# EAGLE board controller_dist_distpn (EAGLE 6.4)
HEIGHT: 2; PARTNAME: controller; REVISION: 4.1; WIDTH: 1.3
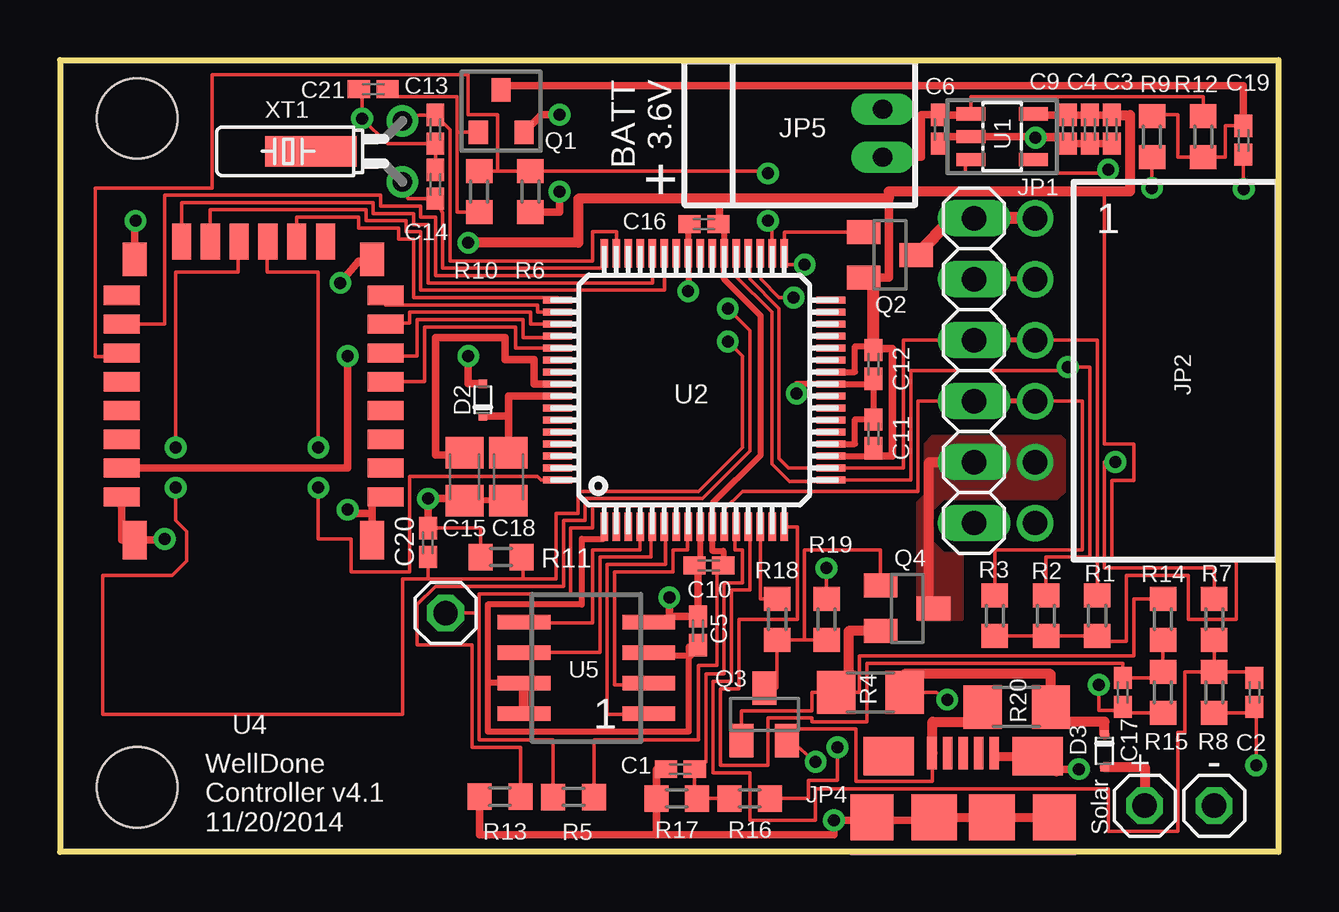
[diagram p0: board, top side]
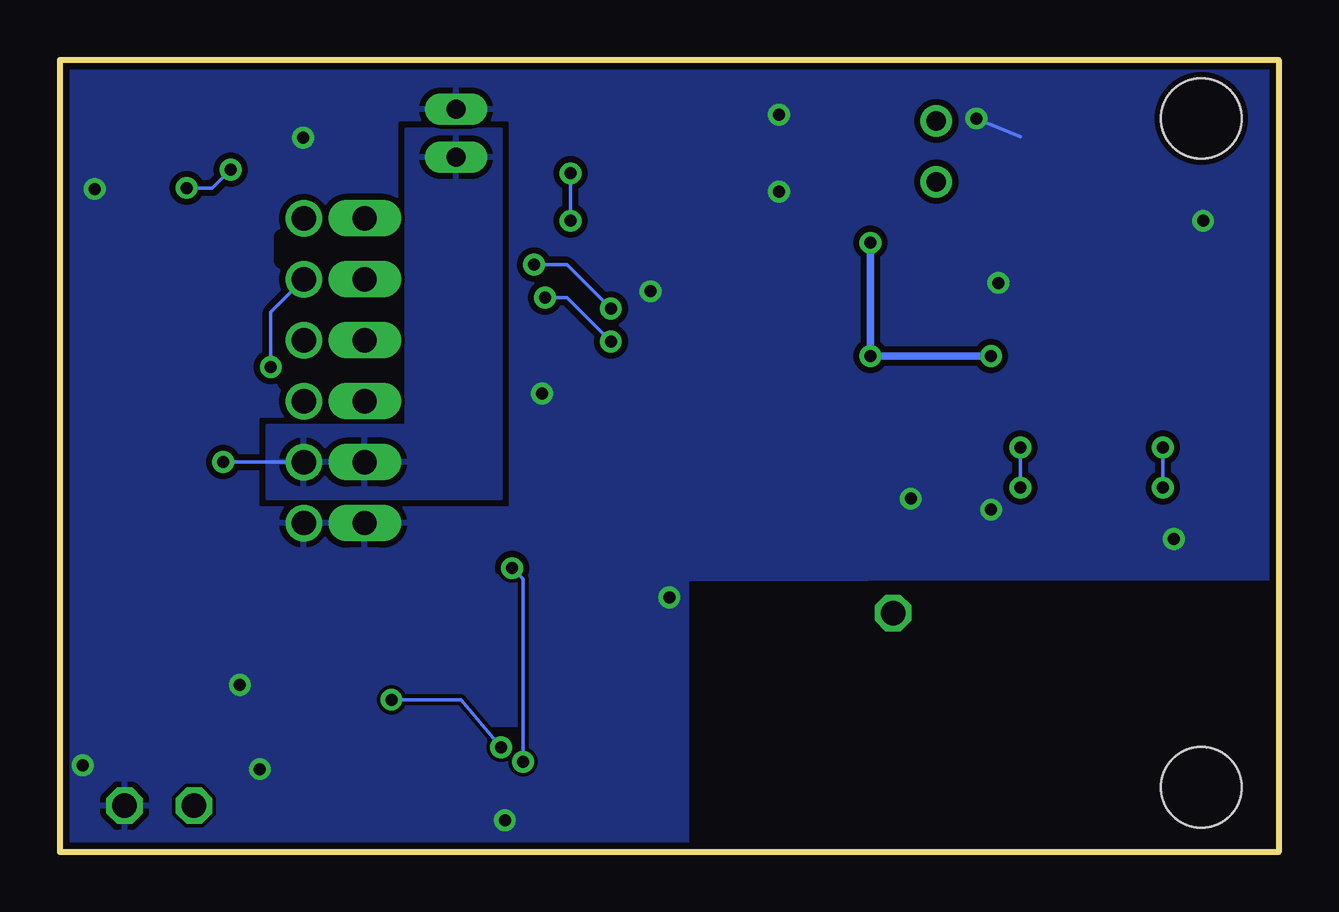
[diagram p1: board, bottom side, seen from below]

Size 50.8 x 33.02 mm. Coordinates in mm from the lower left corner, seen from the top.
Outline: 50.8,0 50.8,33.02 0,33.02 0,0 50.8,0
Copper layers (1*16): Top 0.035mm / dielectric 1.5mm / Bottom 0.035mm
Design rules "default *": minimum track width 6mil, minimum drill 19mil, track to track 6mil, track to pad 6mil, pad to pad 6mil, via to via 6mil, smd to smd 6mil, copper to edge 10mil, drill to drill 8mil, minimum pad ring 10mil, minimum via ring 8mil, stop-mask expansion 4mil, vias tented up to drill 0mil, thermal gap 10mil
Net classes: 0 default: width 0.152 mm, drill 0.305 mm, clearance 0.152 mm
Holes 3.35 mm at 3.23,2.69 3.23,30.58
bRestrict: area 41.3,19.6 to 41.4,20.6; area 41.3,24.6 to 41.6,25.7

## Footprints (pad centres in the part's own frame; a part is rotated, then mirrored left to right if it is on the bottom)
C0402K = smd 0.925 x 0.74: 1 -0.6,0; 2 0.6,0
C0805K = smd 1.3 x 1.6: 1 -1,0; 2 1,0
SC79_INFINEON = smd 0.35 x 0.35: A 0.675,0; C -0.675,0
1X06 = drill 1.016 long: 1 -8.89,0; 3 -6.35,0; 4 -3.81,0; 5 -1.27,0; 6 1.27,0; 7 3.81,0
MOMO-EDGE-8F = drill 1.016: ARLM 0,2.54; CLK 0,7.62; DAT 0,5.08; GND 0,-2.54; V4 0,0; V28 0,10.16
1X01 = drill 1.016 octagon: 1 0,0
MICROUSB-B-FCI = smd 0.4 x 1.35: 1 -1.3,2.675; 2 -0.65,2.675; 3 0,2.675; 4 0.65,2.675; 5 1.3,2.675 | smd 2.1 x 1.6: GND1 -3.1,2.55; GND2 3.1,2.55 | smd 1.8 x 1.9: GND3 -3.8,0; GND6 3.8,0 | smd 1.9 x 1.9: GND4 -1.2,0; GND5 1.2,0
MOMO-PWR-HOUSED = drill 0.8 long: 1 -1,0; 2 1,0
SOT-23 = smd 0.802 x 0.972: 1 -0.95,-0.885; 2 0.95,-0.885; 3 0,0.885
SOT23 = smd 1 x 1.4: 1 -0.95,-1.1; 2 0.95,-1.1; 3 0,1.1
R0603 = smd 1 x 1.1: 1 -0.85,0; 2 0.85,0
R1206 = smd 1.6 x 1.803: 1 -1.422,0; 2 1.422,0
SOT23-5L = smd 0.55 x 1.2: 1 -0.95,-1.3; 2 0,-1.3; 3 0.95,-1.3; 4 0.95,1.3; 5 -0.95,1.3
TQFP64-10X10 = smd 1.2 x 0.3: 1 -5.7,3.75; 2 -5.7,3.25; 3 -5.7,2.75; 4 -5.7,2.25; 5 -5.7,1.75; 6 -5.7,1.25; 7 -5.7,0.75; 8 -5.7,0.25; 9 -5.7,-0.25; 10 -5.7,-0.75; 11 -5.7,-1.25; 12 -5.7,-1.75; 13 -5.7,-2.25; 14 -5.7,-2.75; 15 -5.7,-3.25; 16 -5.7,-3.75; 33 5.7,-3.75; 34 5.7,-3.25; 35 5.7,-2.75; 36 5.7,-2.25; 37 5.7,-1.75; 38 5.7,-1.25; 39 5.7,-0.75; 40 5.7,-0.25; 41 5.7,0.25; 42 5.7,0.75; 43 5.7,1.25; 44 5.7,1.75; 45 5.7,2.25; 46 5.7,2.75; 47 5.7,3.25; 48 5.7,3.75 | smd 0.3 x 1.2: 17 -3.75,-5.7; 18 -3.25,-5.7; 19 -2.75,-5.7; 20 -2.25,-5.7; 21 -1.75,-5.7; 22 -1.25,-5.7; 23 -0.75,-5.7; 24 -0.25,-5.7; 25 0.25,-5.7; 26 0.75,-5.7; 27 1.25,-5.7; 28 1.75,-5.7; 29 2.25,-5.7; 30 2.75,-5.7; 31 3.25,-5.7; 32 3.75,-5.7; 49 3.75,5.7; 50 3.25,5.7; 51 2.75,5.7; 52 2.25,5.7; 53 1.75,5.7; 54 1.25,5.7; 55 0.75,5.7; 56 0.25,5.7; 57 -0.25,5.7; 58 -0.75,5.7; 59 -1.25,5.7; 60 -1.75,5.7; 61 -2.25,5.7; 62 -2.75,5.7; 63 -3.25,5.7; 64 -3.75,5.7
RN20-BTLE-MODULE = smd 1.5 x 0.8: AIO0 0.25,7.3; AIO1 0.25,8.5; AIO2 0.25,9.7; CMD/MLDP 0.25,2.5; GND 11.25,10.9; GND1 0.25,10.9; PIO7 11.25,4.9; RSVD1 11.25,6.1; RSVD2 11.25,7.3; RSVD3 11.25,8.5; RTS/PIO6 11.25,3.7; SPI/PIO 11.25,2.5; UART_RX 0.25,4.9; UART_TX 0.25,6.1; VDD 11.25,9.7; WAKE_SW 0.25,3.7 | smd 0.8 x 1.5: PIO1 2.75,0.25; PIO2 3.95,0.25; PIO3 5.15,0.25; PIO4 6.35,0.25; PIO5 7.55,0.25; WAKE_HW 8.75,0.25 | smd 1 x 1.4: SHIELD1 0.8,1; SHIELD2 10.7,1 | smd 1 x 1.6: SHIELD3 0.8,12.7; SHIELD4 10.7,12.7
SOP08 = smd 0.6 x 2.2: 1 -1.905,-2.6; 2 -0.635,-2.6; 3 0.635,-2.6; 4 1.905,-2.6; 5 1.905,2.6; 6 0.635,2.6; 7 -0.635,2.6; 8 -1.905,2.6
TC26H = drill 0.813: 1 -1.27,0; 2 1.27,0 | smd 1.27 x 3.81: NC-CAN 0,3.81

## Placement (x,y rotation side)
C1  100 nF  [C0402K]  25.86,3.45 180 top
C2  100 nF  [C0402K]  49.78,6.65 270 top
C3  33 pF  [C0402K]  43.84,30.12 270 top
C4  10 pF  [C0402K]  42.93,30.12 270 top
C5  100 nF  [C0402K]  26.59,9.22 90 top
C6  1 uF  [C0402K]  36.68,30.12 270 top
C9  1 uF  [C0402K]  42.01,30.12 270 top
C10  100nF  [C0402K]  27.05,11.95 180 top
C11  100nF  [C0402K]  33.91,17.43 90 top
C12  100 nF  [C0402K]  33.91,20.33 270 top
C13  18 pF  [C0402K]  15.65,27.84 90 top
C14  18 pF  [C0402K]  15.65,30.12 270 top
C15  10 uF  [C0805K]  16.87,15.65 270 top
C16  100nF  [C0402K]  26.84,26.18 180 top
C17  100 nF  [C0402K]  44.3,6.65 270 top
C18  10 uF  [C0805K]  18.69,15.65 270 top
C19  1 uF  [C0402K]  49.33,29.67 270 top
C20  22 pF  [C0402K]  15.34,12.9 90 top
C21  1 uF  [C0402K]  13.06,31.8 180 top
D2  [SC79_INFINEON]  17.63,18.85 90 top
D3  [SC79_INFINEON]  43.54,4.22 270 top
JP1  MOMO-VERT-6M  [1X06]  38.1,17.53 270 top
JP2  MOMO-EDGE-6F  [MOMO-EDGE-8F]  40.64,16.26 0 top
JP3  [1X01]  16.07,9.96 0 top
JP4  CONN-MICROUSB-B-RCPT  [MICROUSB-B-FCI]  37.64,1.45 0 top
JP5  MOMO-PWR-HOUSED  [MOMO-PWR-HOUSED]  34.29,29.97 90 top
JP7  [1X01]  48.11,1.93 0 top
JP8  [1X01]  45.21,1.93 0 top
Q1  MOSFET-N  [SOT-23]  18.39,30.89 0 top
Q2  P-MOSFET  [SOT23]  34.59,24.89 270 top
Q3  [SOT23]  29.36,5.74 0 top
Q4  P-MOSFET  [SOT23]  35.31,10.16 270 top
R1  10K  [R0603]  43.23,9.86 270 top
R2  10K  [R0603]  41.1,9.86 270 top
R3  10K  [R0603]  38.96,9.86 270 top
R4  1 ohm  [R1206]  33.78,6.65 180 top
R5  10K  [R0603]  21.41,2.29 0 top
R6  100K  [R0603]  19.61,27.53 90 top
R7  510K  [R0603]  48.11,9.7 90 top
R8  510K  [R0603]  48.11,6.65 90 top
R9  10K  [R0603]  45.52,29.82 90 top
R10  100K  [R0603]  17.48,27.53 90 top
R11  100K  [R0603]  18.39,12.29 0 top
R12  510K  [R0603]  47.65,29.82 90 top
R13  100K  [R0603]  18.34,2.31 0 top
R14  510K  [R0603]  45.97,9.7 90 top
R15  510K  [R0603]  45.97,6.65 90 top
R16  510K  [R0603]  28.75,2.24 0 top
R17  510K  [R0603]  25.7,2.24 0 top
R18  10K  [R0603]  29.9,9.7 270 top
R19  100K  [R0603]  31.95,9.7 90 top
R20  1 ohm  [R1206]  39.88,6.05 0 top
U1  XC6504-LINEAR-REGULATOR  [SOT23-5L]  39.27,29.82 270 top
U2  PIC24FJ64GA306  [TQFP64-10X10]  26.44,19.26 90 top
U4  RN4020_BT_4.0_MODULE  [RN20-BTLE-MODULE]  13.82,25.7 180 top
U5  FLASH8MSOP8  [SOP08]  21.95,7.67 90 top
XT1  32.768khz  [TC26H]  14.27,29.21 90 top

## Library data of the parts
C1 C2 C5 C10-C12 C16 C17 = rcl; DIGIKEY-PN: 445-1265-1-ND
C3 = rcl; DIGIKEY-PN: 1276-1272-1-ND
C4 = rcl; DIGIKEY-PN: 1276-1139-1-ND
C6 C9 C19 C21 = rcl; DIGIKEY-PN: 445-4114-1-ND
C13 C14 = rcl; DIGIKEY-PN: 445-1238-1-ND
C15 C18 = rcl; DIGIKEY-PN: 1276-2893-1-ND
C20 = rcl; DIGIKEY-PN: 1276-1116-1-ND
D2 = diode; DIGIKEY-PN: RB520S30T1GOSCT-ND; FOOTPRINT: SC-79
D3 = diode; DIGIKEY-PN: RB520S30T1GOSCT-ND; FOOTPRINT: SC79
JP1 = components; DESCRIPTION: 6 Pin Vertical Male Header; DIGIKEY-PN: S1011EC-06-ND; FOOTPRINT: Through Hole
JP2 = components; DESCRIPTION: 6-pin female R/A header; DIGIKEY-PN: S5442-ND; FOOTPRINT: Through Hole
JP3 = pinhead; POPULATE: no
JP4 = custom_ics; DESCRIPTION: MicroUSB-B Receptacle; DIGIKEY-PN: 609-4613-1-ND; FOOTPRINT: Custom SMD
JP5 = components; DESCRIPTION: R/A Shrouded 2 pin connector; DIGIKEY-PN: 455-1719-ND; FOOTPRINT: Through HOle
JP7 JP8 = pinhead; POPULATE: NO
Q1 = custom_ics; DESCRIPTION: N-Channel MOSFET 2N7002P; DIGIKEY-PN: 568-5818-1-ND; FOOTPRINT: SOT-23
Q2 = components; DESCRIPTION: P Channel MOSFET; DIGIKEY-PN: IRLML6402PBFCT-ND
Q3 = transistor-pnp; DESCRIPTION: PNP Transistor; DIGIKEY-PN: 568-1742-1-ND; FOOTPRINT: SOT23
Q4 = components; DIGIKEY-PN: IRLML6402PBFCT-ND
R1-R3 R5 R9 R18 = rcl; DIGIKEY-PN: P10.0KHCT-ND
R4 R20 = rcl; DIGIKEY-PN: 311-1.00FRCT-ND
R6 R10 R11 R13 R19 = rcl; DIGIKEY-PN: P100KHCT-ND
R7 R8 R12 R14-R17 = rcl; DIGIKEY-PN: P510KHCT-ND
U1 = custom_ics; DESCRIPTION: XC6504 Linear Regulator 2.8V; DIGIKEY-PN: 893-1200-1-ND; FOOTPRINT: SOT23-5
U2 = components; DESCRIPTION: PIC24FJ64GA306 Microcontroller; DIGIKEY-PN: PIC24FJ64GA306-I/PT-ND; FOOTPRINT: TQFN64-10mm
U4 = custom_ics; DESCRIPTION: RN4020 Bluetooth 4.0 Module; DIGIKEY-PN: RN4020-V/RM-ND; FOOTPRINT: Custom SMD
U5 = components; DESCRIPTION: M25PX80 1MB Serial Flash; DIST: Digikey; DIST-PN: M25PX80-VMN6TPCT-ND
XT1 = components; DESCRIPTION: Quartz Crystal (Radial Can); DIGIKEY-PN: 535-9034-ND; FOOTPRINT: Through Hole

## Nets
CHG_EN: R18.1 U2.14
CHG_I+: D3.C R4.1 R16.2 R20.2
CHG_I-: Q3.1 Q4.2 R4.2 R14.2
CMD: U2.50 U4.CMD/MLDP
CONN: U4.PIO1
CS: U2.6 U5.1
CTS: U2.43 U4.PIO5
GND: C1.2 C2.2 C3.2 C4.2 C5.2 C6.2 C9.2 C10.2 C11.2 C12.2 C13.2 C14.2 C15.2 C16.2 C17.2 C18.2 C19.2 C20.2 C21.2 JP1.7 JP2.GND JP4.5 JP4.GND2 JP4.GND3 JP4.GND4 JP4.GND5 JP4.GND6 JP5.2 JP7.1 Q1.2 R6.1 R8.1 R11.1 R13.1 R15.1 R17.1 U1.2 U2.9 U2.20 U2.25 U2.41 U4.GND U4.GND1 U4.SHIELD1 U4.SHIELD2 U4.SHIELD3 U4.SHIELD4 U5.4
HW_RESET: R6.2 R10.2 U2.34 U4.PIO7
ICLK: JP1.3 JP2.CLK R2.1 U2.17 U2.37
IDAT: JP1.4 JP2.DAT R1.1 U2.18 U2.36
IRQ: JP1.5 JP2.ARLM R3.1 U2.11
MEM_POW: C5.1 U2.1 U5.3 U5.7 U5.8
MLDP_EV: U2.49 U4.PIO2
N$1: R9.1 U1.3
N$2: C21.1 Q1.1 R10.1
N$3: D3.A JP8.1
N$4: JP3.1 R5.1 U2.7
N$5: JP4.1 Q3.2 R19.2 R20.1
N$6: C14.1 U2.47 XT1.2
N$7: C13.1 U2.48 XT1.1
N$10: Q3.3 Q4.1 R18.2 R19.1
N$11: C19.1 Q1.3 R9.2 R12.1
PIO3: U2.64 U4.PIO3
PIO4: C20.1 R11.2 U2.35 U4.PIO4
RTS: U2.45 U4.RTS/PIO6
RX: U2.52 U4.UART_RX
SAMP_CHG+: C1.1 R16.1 R17.2 U2.12
SAMP_CHG-: C17.1 R14.1 R15.2 U2.16
SCLK: U2.5 U5.6
SDI: U2.8 U5.2
SDO: U2.4 U5.5
TX: U2.53 U4.UART_TX
V+: C6.1 JP1.6 JP2.V4 JP5.1 Q4.3 R7.2 R12.2 U1.1
VBAT: C18.1 D2.C U2.57
VBAT_SAMP: C2.1 R7.1 R8.2 U2.13
VCAP: C15.1 U2.56
VCC_EN: Q2.1 R13.2 U2.33
VCCINT: C3.1 C4.1 C9.1 C10.1 C11.1 C12.1 C16.1 D2.A Q2.2 R1.2 R2.2 R3.2 R5.2 U1.5 U2.10 U2.19 U2.26 U2.38 U4.VDD
VCCIO: JP1.1 JP2.V28 Q2.3
WAKE_HW: U2.44 U4.WAKE_HW
WAKE_SW: U2.51 U4.WAKE_SW

## Tracks (layer width: path | path; a pad name or v marks a point on that pad's centre or on a via)
CHG_EN
  Top 0.152: 30.19,10.55 R18.1 29.19,10.55 U2.14
CHG_I+  (via drill 0.5)
  Top 0.152: R16.2 31.19,2.23 31.19,3 32.41,3 v32.41,4.37 | v36.98,6.35 36.53,6.65 R4.1
  Top 0.406: R4.1 35.2,7.42 41.3,7.42 R20.2 41.4,6.04 41.4,5.44 43.54,5.44 D3.C
  Bottom 0.152: v32.41,4.37 34.09,6.35 v36.98,6.35
CHG_I-
  Top 0.152: R14.2 44.75,10.55 44.75,8.18 33.33,8.18 33.33,6.65 32.87,6.65 R4.2 31.34,6.65 31.34,5.89 28.41,5.89 Q3.1
  Top 0.406: Q4.2 32.87,9.21 32.87,6.65
CMD
  Top 0.152: U2.50 19.91,22.51 19.91,22.81 13.57,22.81 U4.CMD/MLDP
CS
  Top 0.152: U5.1 24.55,5.74 22.81,5.74 22.81,11.99 25.25,11.99 25.25,13.56 U2.6 25.22,13.53
CTS
  Top 0.152: U4.PIO5 6.27,26.77 12.75,26.77 12.75,26.31 14.43,26.31 14.43,25.86 15.04,25.86 15.04,23.42 25.19,23.42 U2.43
GND  (via drill 0.5)
  Top 0.152: R15.1 44.3,5.8 C17.2 arc-90 44.19,5.9 43.3,5.9 v43.3,6.97 | v49.86,3.62 49.86,5.73 arc90 49.78,5.8 C2.2 arc-90 49.58,5.8 R8.1 | C13.2 C14.2 13.66,29.52 v12.6,30.58 12.6,31.8 C21.2 | R11.1 17.54,13.51 16.56,13.51 16.56,13.5 C20.2 | 24.79,9.58 25.4,9.58 25.4,9.82 | C19.2 49.33,27.64 v49.35,27.64
  Top 0.254: C12.2 33.91,19.51 U2.25 30.7,19.51 v30.7,19.11 | C12.2 C11.2 33.14,18.04 33.14,17.01 U2.20 | 33.91,19.82 C12.2 | v26.18,23.38 v26.19,23.38 U2.41 26.19,26.17 C16.2 | C10.2 26.69,11.95 U2.9 | C18.2 C15.2
  Top 0.305: 3.12,12.73 U4.SHIELD4 | C10.2 26.59,11.95 C5.2 25.4,9.82 v25.4,10.62 | U5.4 24.79,9.58 24.79,9.55 24.64,9.55 | C15.2 16.87,14.73 v15.34,14.73 C20.2 | U4.GND1 13.02,14.8 13.02,14.12 | 13.02,14.12 U4.SHIELD3 | U4.SHIELD4 2.57,13.01 U4.GND | U4.SHIELD4 4.37,13.01 v4.37,13.06 | U4.SHIELD1 12.9,24.7 12.9,24.64 12.45,24.64 v11.68,23.72 | 40.79,4.05 41.53,3.31 41.53,3.45 v42.47,3.45 | U4.SHIELD2 3.12,26.31 v3.15,26.31 | C6.2 36.53,29.82 U1.2 41.86,29.82 C9.2 | C3.2 C4.2 C9.2 | v40.66,29.78 41.86,29.78 C9.2 | R6.1 20.83,26.68 v20.83,27.53 | JP4.GND4 36.44,1.32 v32.26,1.32 | v32.26,1.32 33.84,1.32 JP4.GND3 | Q1.2 20.07,30.73 v20.83,30.73 | R13.1 17.49,0.71 24.85,0.71 | 24.85,0.71 R17.1 24.85,3.45 C1.2 | 24.85,0.71 32.26,0.71 v32.26,1.32 | v11.99,14.28 11.99,14.12 13.02,14.12
  Top 0.381: JP4.5 39.07,4 JP4.GND2 40.79,4.05 | JP4.GND4 JP4.GND5 JP4.GND6 40.74,2.15 | JP4.GND3 33.78,1.51 33.78,1.63
  Bottom 0.152: v12.6,30.58 10.77,29.82
  pour Bottom (isolate 0.254, rank 2): 0.25,11.38 50.85,11.33 50.85,32.87 0.41,32.87
  pour Bottom: 24.64,5.89 24.64,-0.05 50.85,-0.05 50.85,5.89
  pour Bottom: 24.64,11.53 24.64,5.28 50.85,5.28 50.85,11.53
HW_RESET  (via drill 0.5)
  Top 0.152: U4.PIO7 2.57,20.65 1.47,20.65 1.47,27.69 6.35,27.69 6.35,32.41 17.02,32.41 17.02,30.73 18.24,30.73 18.24,28.38 | R10.2 18.24,28.38 | 18.24,28.38 R6.2 29.52,28.38 v29.52,28.3 | U2.34 29.67,24.98 29.67,26.16 v29.52,26.31
  Bottom 0.152: v29.52,26.31 v29.52,28.3
ICLK  (via drill 0.5)
  Top 0.152: U2.37 28.14,24.92 28.14,24.03 29.67,22.5 29.67,16.18 30.4,15.45 32.08,15.45 U2.17 35.46,15.51 35.46,20.07 41.86,20.07 v42.01,20.22 42.93,20.22 42.93,12.29 41.1,12.29 R2.1
  Top 0.203: JP2.CLK JP1.3
  Bottom 0.152: v42.01,20.22 42.01,22.5 JP2.CLK
IDAT
  Top 0.152: 28.72,24.96 U2.36 28.75,24.9 28.75,23.88 29.97,22.66 29.97,16.41 30.37,16.01 U2.18 35.15,16.01 35.15,21.34 JP1.4 | R1.1 43.23,21.34 JP2.DAT
  Top 0.203: JP2.DAT JP1.4
IRQ
  Top 0.152: JP1.5 35.76,18.8 35.76,15.04 28.45,15.04 27.69,14.28 U2.11 | JP2.ARLM 42.62,18.8 42.62,12.6 38.96,12.6 R3.1
  Top 0.203: JP2.ARLM JP1.5
MEM_POW
  Top 0.203: U5.7 19.35,7.06 | 17.83,7.06 17.83,6.96 | 26.21,8.57 C5.1
  Top 0.254: 19.35,7.06 17.83,7.06 | U5.3 24.55,8.18 26.31,8.18 26.31,8.57 26.21,8.57 26.21,5.03 17.83,5.03 17.83,6.96 17.83,10.31 21.74,10.31 21.74,13.06 22.66,13.06 22.66,13.56 U2.1
  Top 0.406: U5.8 U5.7
MLDP_EV
  Top 0.152: U4.PIO2 9.87,26.47 12.45,26.47 12.45,26.01 14.12,26.01 14.12,25.55 14.73,25.55 14.73,23.11 20.74,23.11 U2.49
N$1  (via drill 0.5)
  Top 0.152: U1.3 37.74,28.87 37.74,28.3 43.69,28.3 v43.69,28.45 | v45.52,27.69 R9.1
  Bottom 0.152: v43.69,28.45 44.45,27.69 v45.52,27.69
N$2
  Top 0.152: C21.1 13.66,31.5 16.56,31.5 16.56,30 | 16.56,30 Q1.1 | R10.1 16.56,26.68 16.56,30
N$3
  Top 0.406: D3.A 45.21,3.54 JP8.1
N$4
  Top 0.152: U2.7 25.69,14.43 22.2,14.43 22.2,13.51 21.28,13.51 21.28,10.77 17.48,10.77 17.48,9.96 | 17.48,9.96 17.48,4.67 20.56,4.67 R5.1 20.22,2.45 | JP3.1 17.48,9.96
N$5  (via drill 0.5)
  Top 0.152: JP4.1 36.37,4.12 36.37,2.95 33.17,2.95 33.17,5.13 30.47,5.13 Q3.2 30.47,4.64 v31.5,3.76 | R19.2 v31.95,11.84
  Top 0.406: 36.37,4.12 36.37,5.44 38.2,5.44 38.2,6.04 R20.1
  Bottom 0.152: v31.95,11.84 31.5,11.38 v31.5,3.76
N$6
  Top 0.152: U2.47 23.19,25.86 22.2,25.86 22.2,24.64 16.26,24.64 16.26,30.11 C14.1 14.98,30.72 XT1.2
N$7
  Top 0.152: U2.48 22.69,24.33 15.95,24.33 15.95,26.63 C13.1 14.52,27.24 XT1.1
N$10
  Top 0.152: R18.2 29.52,8.85 | R18.2 31.04,8.85 | 31.04,8.85 R19.1 | Q4.1 34.21,12.6 31.04,12.6 31.04,8.85 | Q3.3 29.9,6.84 R18.2
N$11
  Top 0.152: R9.2 45.52,30.73 46.58,30.73 46.58,28.97 R12.1 48.56,28.97 48.56,30.28 C19.1
  Top 0.305: Q1.3 18.39,31.95 49.33,31.95 C19.1
PIO3  (via drill 0.5)
  Top 0.152: v10.77,15.19 10.77,13.06 12.14,13.06 12.14,11.68 14.58,11.68 14.58,15.65 19.91,15.65 20.05,15.51 U2.64 | v10.77,16.87 10.77,24.18 8.64,24.18 8.64,25.45 U4.PIO3
  Bottom 0.152: v10.77,15.19 v10.77,16.87
PIO4  (via drill 0.5)
  Top 0.152: U4.PIO4 7.42,25.45 7.42,24.18 4.83,24.18 v4.83,16.87 | 15.34,11.38 19.3,11.38 | 19.3,11.38 20.68,11.38 20.68,14.12 21.59,14.12 21.59,15.04 26.62,15.04 28.45,16.87 28.45,20.68 v27.84,21.28 | v30.58,23.11 29.97,23.11 29.21,23.88 29.21,24.94 U2.35 | C20.1 15.34,11.38 | R11.2 19.3,12.23 19.3,11.38 | v4.83,15.19 4.83,13.82 5.28,13.36 5.28,12.14 4.67,11.53 1.78,11.53 1.78,5.74 14.27,5.74 14.27,11.38 15.34,11.38
  Bottom 0.152: v4.83,16.87 v4.83,15.19 | v27.84,21.28 29.67,23.11 v30.58,23.11
RTS
  Top 0.152: U2.45 24.19,24.03 15.65,24.03 15.65,26.47 15.04,26.47 15.04,26.92 13.36,26.92 13.36,27.38 4.37,27.38 4.37,22 U4.RTS/PIO6
RX
  Top 0.152: U2.52 20.74,21.44 19.3,21.44 19.3,22.2 14.88,22.2 14.88,20.68 13.57,20.68 U4.UART_RX
SAMP_CHG+
  Top 0.152: U2.12 28.14,13.56 28.14,12.6 28.45,12.6 28.45,11.23 27.69,11.23 27.69,7.42 26.92,7.42 26.92,3.76 C1.1 26.46,2.39 R17.2 R16.1
SAMP_CHG-
  Top 0.152: R14.1 R15.2 45.97,7.26 C17.1 44.3,7.87 33.63,7.87 33.63,5.44 31.34,5.44 31.34,5.59 29.52,5.59 29.52,3.61 27.53,3.61 27.53,6.81 28.3,6.81 28.3,9.7 30.73,9.7 30.73,13.56 U2.16
SCLK
  Top 0.152: U5.6 19.35,8.33 22.5,8.33 22.5,12.29 24.64,12.29 24.64,13.56 U2.5
SDI
  Top 0.152: U5.2 24.55,6.96 23.11,6.96 23.11,11.68 25.55,11.68 25.55,12.6 26.16,12.6 26.16,13.56 U2.8
SDO
  Top 0.152: 24.15,13.56 U2.4 24.18,12.6 22.2,12.6 22.2,9.55 19.35,9.55 U5.5
TX
  Top 0.152: U2.53 19,21.01 19,21.89 15.19,21.89 15.19,19.61 U4.UART_TX
V+  (via drill 0.5)
  Top 0.152: R7.2 48.11,11.84 43.54,11.84 43.54,16.26 v43.99,16.26 | U1.1 37.97,31.5 47.65,31.5 R12.2
  Top 0.305: 38.1,16 JP1.6 | 37.74,30.77 U1.1 37.97,30.72 C6.1 36.68,30.73 35.92,30.73 35.92,28.97 JP5.1
  Top 0.406: Q4.3 36.22,10.5 36.22,16.26 JP1.6
  Bottom 0.152: v43.99,16.26 JP2.V4
  pour Bottom: 32.41,30.12 36.37,30.12 36.37,17.78 42.16,17.78 42.16,14.73 32.41,14.73
  pour Top (no thermals): 35.76,9.7 36.98,9.7 37.59,9.7 37.59,12.45 36.83,12.45 36.37,12.9 36.37,14.27 36.83,14.73 41.55,14.73 41.86,15.04 41.86,17.17 41.71,17.32 36.37,17.32 36.07,17.02 36.07,14.88 35.76,14.58
VBAT
  Top 0.305: C18.1 18.69,18.17 | 18.69,18.17 D2.C | U2.57 18.69,19.01 18.69,18.17
VBAT_SAMP
  Top 0.152: R8.2 48.11,7.3 | R8.2 46.89,7.51 46.89,4.98 46.58,4.98 46.58,0.86 43.69,0.86 43.69,2.64 31.5,2.64 31.5,1.32 28.75,1.32 28.75,3.3 27.23,3.3 27.23,7.11 27.99,7.11 27.99,10.92 28.75,10.92 28.75,13.5 U2.13 | R7.1 R8.2 | C2.1 49.78,7.51 R8.2
VCAP
  Top 0.305: U2.56 19.76,19.51 19.76,20.52 18.54,20.52 18.54,21.44 15.65,21.44 15.65,16.56 16.78,16.56 C15.1
VCC_EN  (via drill 0.5)
  Top 0.152: 33.63,25.84 Q2.1 30.19,25.84 U2.33 30.19,24.49 v31.04,24.49 | v27.84,22.66 28.75,21.74 28.75,16.71 26.77,14.73 21.89,14.73 21.89,13.82 20.98,13.82 20.98,11.07 15.65,11.07 14.88,10.31 14.88,8.64 17.17,8.64 17.17,4.37 19.19,4.37 R13.2
  Bottom 0.152: v27.84,22.66 29.67,24.49 v31.04,24.49
VCCINT  (via drill 0.5)
  Top 0.152: R3.2 R2.2 R1.2 42.99,8.79 44.45,8.79 44.45,11.53 47.04,11.53 47.04,9.7 49.02,9.7 49.02,12.14 43.84,12.14 43.84,15.49 44.75,15.49 44.75,17.02 43.54,17.02 43.54,27.53 | C10.1 27.38,11.68 27.38,7.78 26.62,7.78 26.62,4.67 22.26,4.67 R5.2
  Top 0.254: U2.26 33.14,20.01 33.14,21.09 33.91,21.09 C12.1 | 33.91,16.66 C11.1 | 27.2,13.56 U2.10 27.19,12.56 27.65,12.56 C10.1 | U2.19 34.39,16.51 | C16.1 27.69,25.98 U2.38 27.69,23.88 29.21,22.35 29.21,16.56 27.2,14.55 27.2,13.57
  Top 0.305: 27.2,13.57 U2.10 | C11.1 arc-90 33.79,16.51 34.39,16.51 34.7,16.51 34.7,20.98 33.91,20.98 C12.1 | C3.1 C4.1 C9.1 40.42,30.72 U1.5 | v11.99,20.68 11.99,16.01 U4.VDD | C16.1 27.49,26.23 27.49,27.23 | D2.A 17.02,19.52 v17.02,20.68
  Top 0.356: 34.54,27.23 34.54,23.94 Q2.2
  Top 0.406: C3.1 44.6,30.72 44.6,27.53 43.54,27.53 34.54,27.53 34.54,27.23 27.49,27.23 21.6,27.23 21.6,25.4 v17.02,25.4
  Top 0.508: 33.91,21.09 33.91,23.94 Q2.2
  Bottom 0.305: v17.02,25.4 v17.02,20.68 v11.99,20.68
VCCIO
  Top 0.508: JP2.V28 JP1.1 37.22,26.42 Q2.3
WAKE_HW
  Top 0.152: U4.WAKE_HW 5.07,27.08 13.06,27.08 13.06,26.62 14.73,26.62 14.73,26.16 15.34,26.16 15.34,23.72 24.69,23.72 U2.44
WAKE_SW
  Top 0.152: U2.51 19.61,22.01 19.61,22.5 14.58,22.5 14.58,22.05 13.57,22.05 U4.WAKE_SW

## Text on the board
tPlace: BATT / 3.6V | + | + | - | WellDone / Controller v4.1 / 11/20/2014 | Solar